# EAGLE board 05_NOT_New (EAGLE 7.5.0)
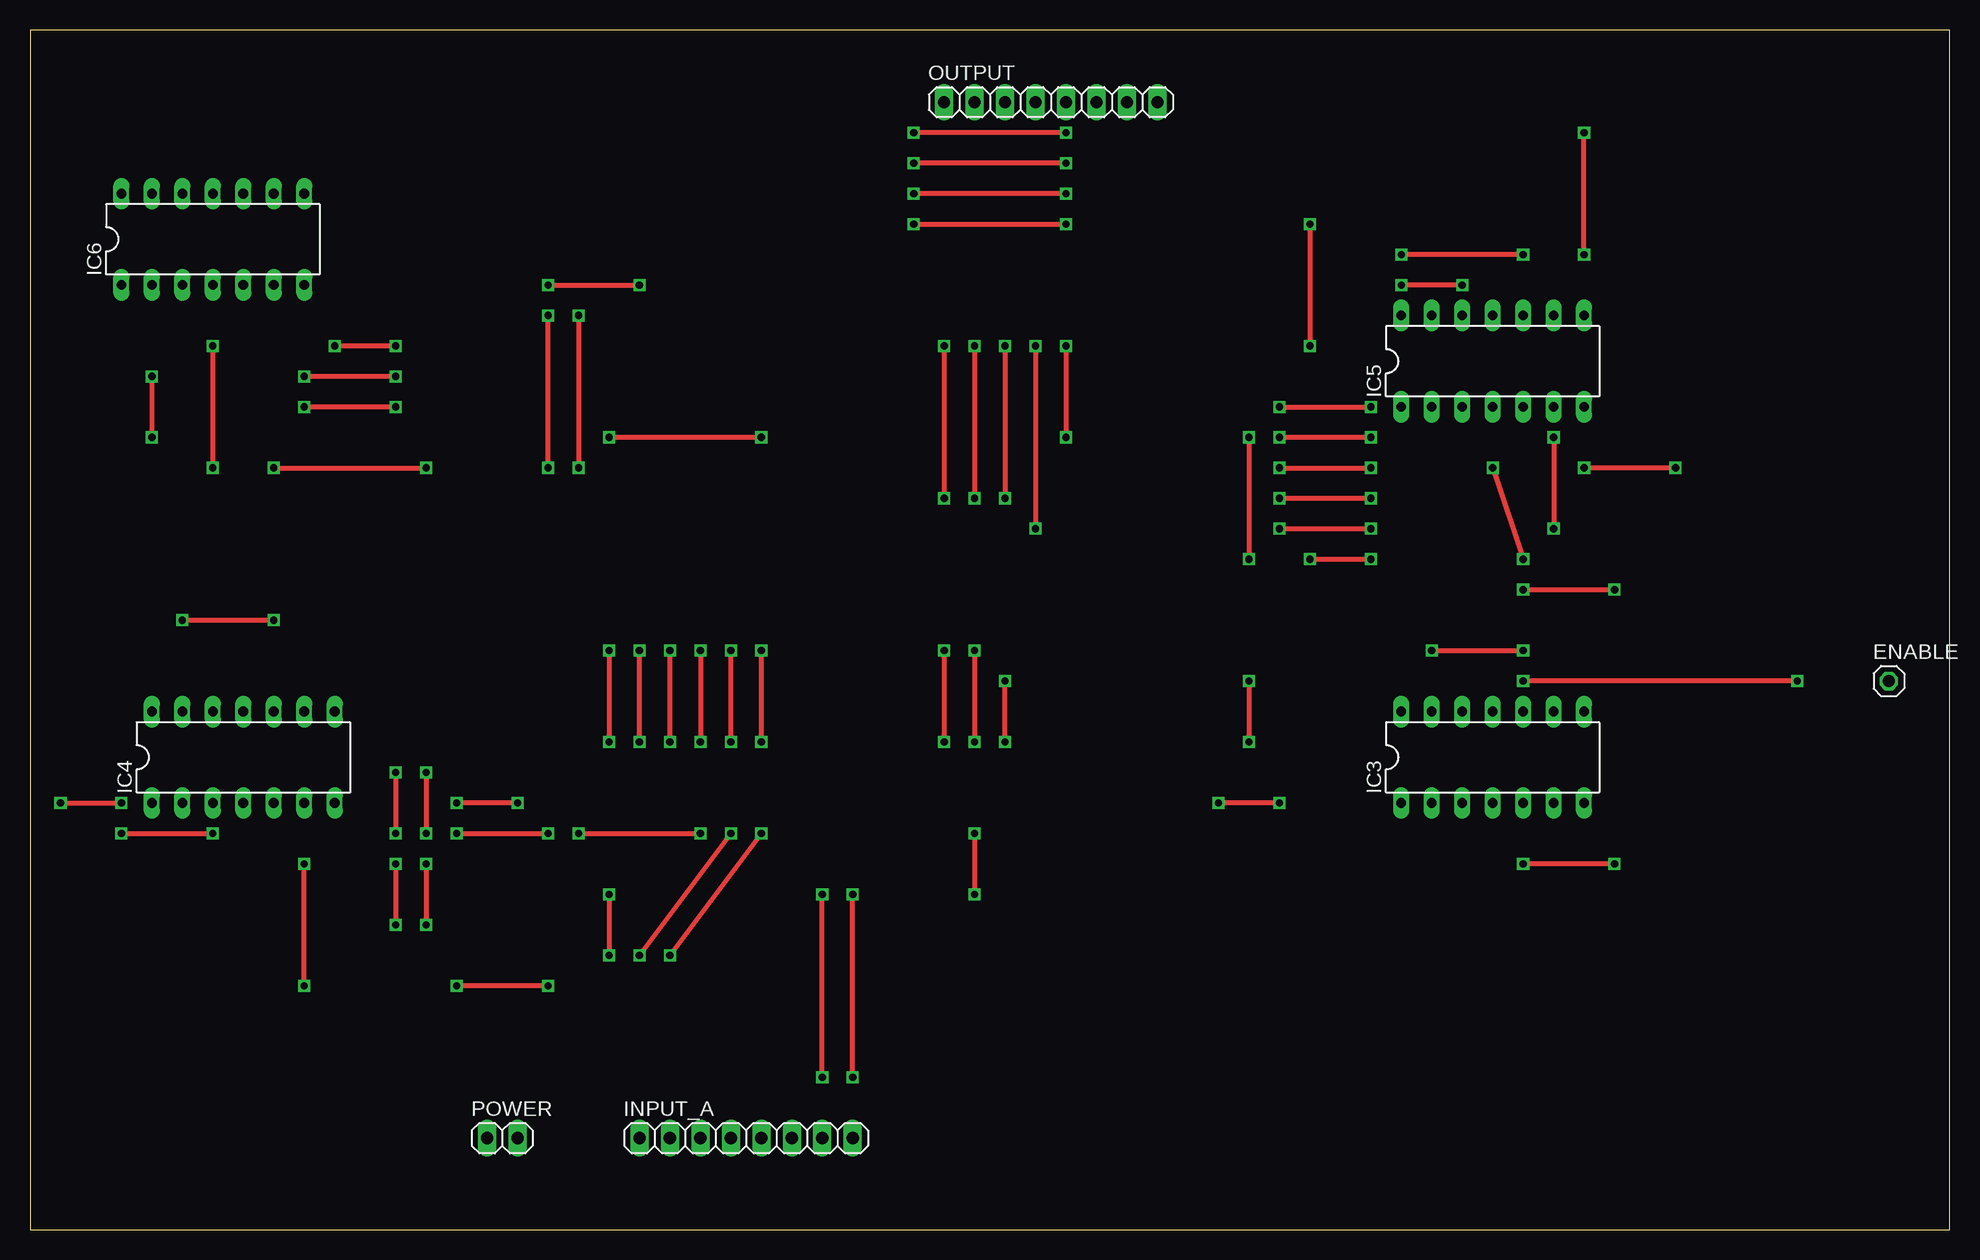
[diagram p0: board, top side]
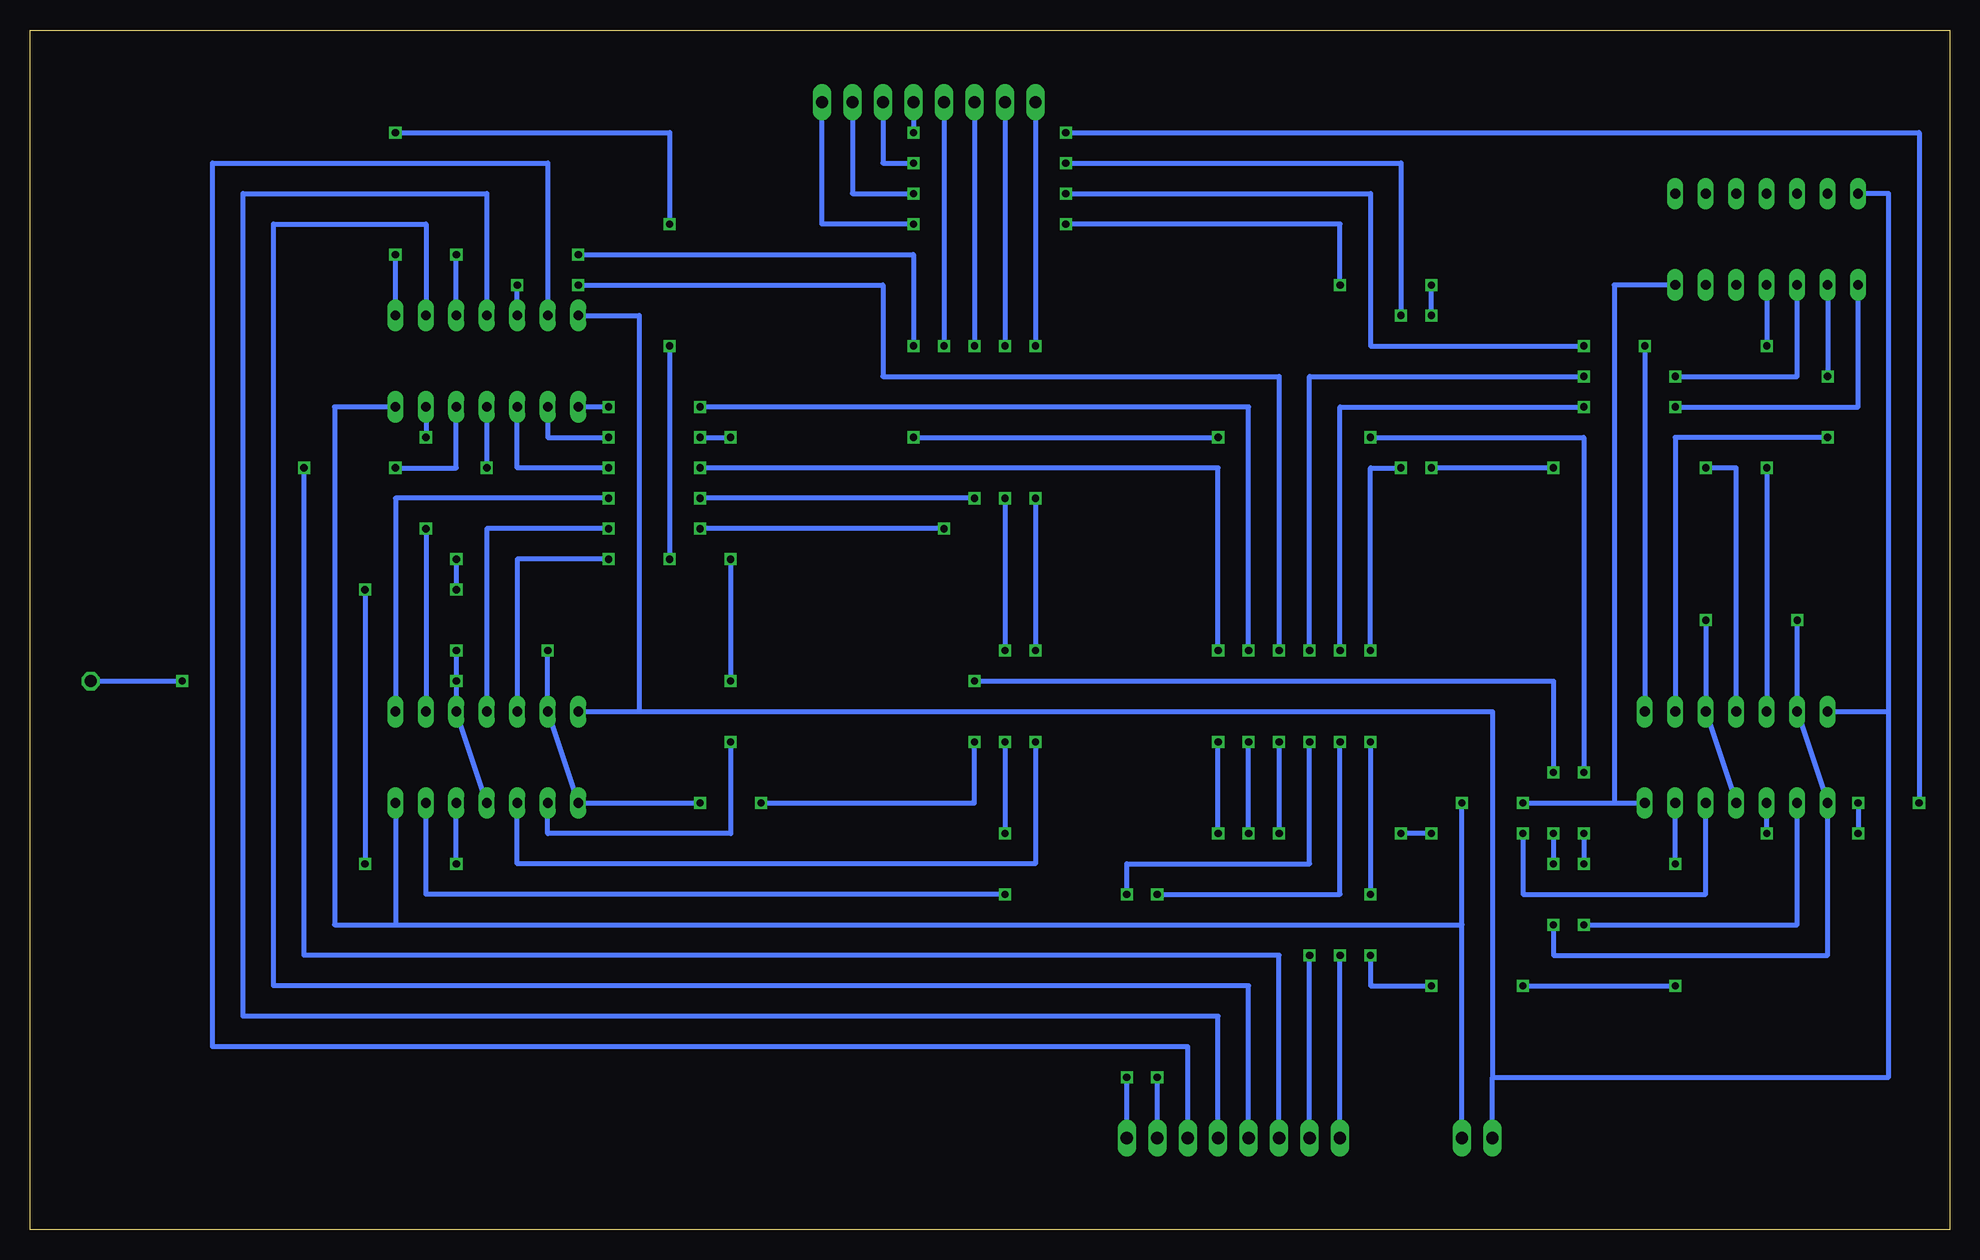
[diagram p1: board, bottom side, seen from below]

Size 160 x 100 mm. Coordinates in mm from the lower left corner, seen from the top.
Outline: 0,0 160,0 160,100 0,100 0,0
Copper layers (1*16): Top 0.035mm / dielectric 1.5mm / Bottom 0.035mm
Design rules "default": minimum track width 10mil, minimum drill 24mil, track to track 8mil, track to pad 8mil, pad to pad 8mil, via to via 8mil, smd to smd 8mil, copper to edge 40mil, drill to drill 8mil, minimum pad ring 10mil, minimum via ring 8mil, stop-mask expansion 4mil, vias tented up to drill 0mil, thermal gap 10mil

## Footprints (pad centres in the part's own frame; a part is rotated, then mirrored left to right if it is on the bottom)
1X01 = drill 1.016 octagon: 1 0,0
DIL14 = drill 0.813 long: 1 -7.62,-3.81; 2 -5.08,-3.81; 3 -2.54,-3.81; 4 0,-3.81; 5 2.54,-3.81; 6 5.08,-3.81; 7 7.62,-3.81; 8 7.62,3.81; 9 5.08,3.81; 10 2.54,3.81; 11 0,3.81; 12 -2.54,3.81; 13 -5.08,3.81; 14 -7.62,3.81
1X08 = drill 1.016 long: 1 -8.89,0; 2 -6.35,0; 3 -3.81,0; 4 -1.27,0; 5 1.27,0; 6 3.81,0; 7 6.35,0; 8 8.89,0
1X02 = drill 1.016 long: 1 -1.27,0; 2 1.27,0

## Placement (x,y rotation side)
ENABLE  [1X01]  154.94,45.72 0 top
IC3  74LS126N  [DIL14]  121.92,39.37 0 top
IC4  74LS126N  [DIL14]  17.78,39.37 0 top
IC5  74LS04N  [DIL14]  121.92,72.39 0 top
IC6  74LS04N  [DIL14]  15.24,82.55 0 top
INPUT_A  [1X08]  59.69,7.62 0 top
OUTPUT  [1X08]  85.09,93.98 0 top
POWER  [1X02]  39.37,7.62 0 top

## Library data of the parts
ENABLE INPUT_A OUTPUT POWER = pinhead
IC3-IC6 = 74xx-eu

## Nets
GND: IC3.7 IC4.7 IC5.7 IC6.7 POWER.2
N$1: IC5.1 INPUT_A.1
N$3: IC5.3 INPUT_A.2
N$5: IC5.5 INPUT_A.3
N$7: IC5.9 INPUT_A.4
N$9: IC5.11 INPUT_A.5
N$11: IC5.13 INPUT_A.6
N$13: IC6.1 INPUT_A.7
N$15: IC6.3 INPUT_A.8
N$18: IC3.5 IC5.4
N$19: IC3.9 IC5.6
N$20: IC3.12 IC5.8
N$21: IC4.2 IC5.10
N$22: IC4.5 IC5.12
N$23: IC4.9 IC6.2
N$24: IC4.12 IC6.4
N$25: IC3.3 OUTPUT.1
N$26: IC3.6 OUTPUT.2
N$27: IC3.8 OUTPUT.3
N$28: IC3.11 OUTPUT.4
N$29: IC4.3 OUTPUT.5
N$30: IC4.6 OUTPUT.6
N$31: IC4.8 OUTPUT.7
N$32: IC4.11 OUTPUT.8
N$33: ENABLE.1 IC3.1 IC3.4 IC3.10 IC3.13 IC4.1 IC4.4 IC4.10 IC4.13
N$34: IC3.2 IC5.2
VCC: IC3.14 IC4.14 IC5.14 IC6.14 POWER.1

## Tracks (layer width: path | path; a pad name or v marks a point on that pad's centre or on a via)
GND  (via drill 0.6)
  Top 0.406: v40.64,35.56 v35.56,35.56
  Bottom 0.406: POWER.2 40.64,25.4 | 40.64,25.4 v40.64,35.56 | v35.56,35.56 27.94,35.56 | 27.94,35.56 IC4.7 | IC6.7 27.94,78.74 27.94,35.56 | IC3.7 129.54,25.4 | 129.54,25.4 40.64,25.4 | IC5.7 134.62,68.58 134.62,25.4 129.54,25.4
N$1  (via drill 0.6)
  Top 0.406: v50.8,22.86 v58.42,33.02 | v58.42,40.64 v58.42,48.26 | v104.14,68.58 v111.76,68.58
  Bottom 0.406: INPUT_A.1 v50.8,22.86 | v58.42,33.02 v58.42,40.64 | v58.42,48.26 58.42,68.58 v104.14,68.58 | v111.76,68.58 IC5.1
N$3  (via drill 0.6)
  Top 0.406: v53.34,22.86 v60.96,33.02 | v60.96,40.64 v60.96,48.26 | v104.14,63.5 v111.76,63.5
  Bottom 0.406: INPUT_A.2 v53.34,22.86 | v60.96,33.02 v60.96,40.64 | v60.96,48.26 60.96,63.5 v104.14,63.5 | v111.76,63.5 119.38,63.5 IC5.3
N$5  (via drill 0.6)
  Top 0.406: v137.16,63.5 v129.54,63.5
  Bottom 0.406: INPUT_A.3 55.88,22.86 137.16,22.86 v137.16,63.5 | v129.54,63.5 124.46,63.5 IC5.5
N$7
  Bottom 0.406: INPUT_A.4 58.42,20.32 139.7,20.32 139.7,83.82 127,83.82 IC5.9
N$9
  Bottom 0.406: INPUT_A.5 60.96,17.78 142.24,17.78 142.24,86.36 121.92,86.36 IC5.11
N$11
  Bottom 0.406: INPUT_A.6 63.5,15.24 144.78,15.24 144.78,88.9 116.84,88.9 IC5.13
N$13  (via drill 0.6)
  Top 0.406: v66.04,12.7 v66.04,27.94 | v50.8,40.64 v50.8,48.26 | v30.48,68.58 v22.86,68.58
  Bottom 0.406: INPUT_A.7 v66.04,12.7 | v66.04,27.94 50.8,27.94 v50.8,40.64 | v50.8,48.26 50.8,68.58 v30.48,68.58 | v22.86,68.58 7.62,68.58 IC6.1
N$15  (via drill 0.6)
  Top 0.406: v68.58,12.7 v68.58,27.94 | v53.34,40.64 v53.34,48.26 | v30.48,71.12 v22.86,71.12
  Bottom 0.406: INPUT_A.8 v68.58,12.7 | v68.58,27.94 68.58,30.48 53.34,30.48 v53.34,40.64 | v53.34,48.26 53.34,71.12 v30.48,71.12 | v22.86,71.12 12.7,71.12 IC6.3
N$18  (via drill 0.6)
  Top 0.406: v121.92,63.5 v124.46,55.88 | v124.46,53.34 v132.08,53.34 | v132.08,30.48 v124.46,30.48
  Bottom 0.406: IC5.4 v121.92,63.5 | v124.46,55.88 v124.46,53.34 | v132.08,53.34 v132.08,30.48 | v124.46,30.48 IC3.5
N$19  (via drill 0.6)
  Top 0.406: v127,66.04 v127,58.42
  Bottom 0.406: IC5.6 v127,66.04 | v127,58.42 IC3.9
N$20  (via drill 0.6)
  Top 0.406: v129.54,81.28 v129.54,91.44 | v106.68,83.82 v106.68,73.66 | v106.68,55.88 v111.76,55.88
  Bottom 0.406: IC5.8 v129.54,81.28 | v129.54,91.44 106.68,91.44 v106.68,83.82 | v106.68,73.66 v106.68,55.88 | v111.76,55.88 119.38,55.88 IC3.12
N$21  (via drill 0.6)
  Top 0.406: v124.46,81.28 v114.3,81.28 | v86.36,73.66 v86.36,66.04 | v60.96,66.04 v48.26,66.04 | v30.48,38.1 v30.48,33.02 | v30.48,30.48 v30.48,25.4
  Bottom 0.406: IC5.10 v124.46,81.28 | v114.3,81.28 86.36,81.28 v86.36,73.66 | v86.36,66.04 v60.96,66.04 | v48.26,66.04 30.48,66.04 v30.48,38.1 | v30.48,33.02 v30.48,30.48 | v30.48,25.4 12.7,25.4 IC4.2
N$22  (via drill 0.6)
  Top 0.406: v119.38,78.74 v114.3,78.74 | v55.88,48.26 v55.88,40.64 | v35.56,33.02 v43.18,33.02 | v45.72,33.02 v55.88,33.02
  Bottom 0.406: IC5.12 v119.38,78.74 | v114.3,78.74 88.9,78.74 88.9,71.12 55.88,71.12 v55.88,48.26 | v55.88,40.64 v55.88,33.02 | v35.56,33.02 35.56,27.94 20.32,27.94 IC4.5 | v43.18,33.02 v45.72,33.02
N$23  (via drill 0.6)
  Top 0.406: v10.16,71.12 v10.16,66.04
  Bottom 0.406: IC6.2 v10.16,71.12 | v10.16,66.04 22.86,66.04 IC4.9
N$24  (via drill 0.6)
  Top 0.406: v15.24,73.66 v15.24,63.5
  Bottom 0.406: IC6.4 v15.24,73.66 | v15.24,63.5 IC4.12
N$25  (via drill 0.6)
  Top 0.406: v76.2,73.66 v76.2,60.96 | v76.2,48.26 v76.2,40.64
  Bottom 0.406: OUTPUT.1 v76.2,73.66 | v76.2,60.96 v76.2,48.26 | v76.2,40.64 76.2,30.48 119.38,30.48 IC3.3
N$26  (via drill 0.6)
  Top 0.406: v78.74,73.66 v78.74,60.96 | v78.74,48.26 v78.74,40.64 | v78.74,33.02 v78.74,27.94
  Bottom 0.406: OUTPUT.2 v78.74,73.66 | v78.74,60.96 v78.74,48.26 | v78.74,40.64 v78.74,33.02 | v78.74,27.94 127,27.94 IC3.6
N$27  (via drill 0.6)
  Top 0.406: v81.28,73.66 v81.28,60.96 | v104.14,60.96 v111.76,60.96
  Bottom 0.406: OUTPUT.3 v81.28,73.66 | v81.28,60.96 v104.14,60.96 | v111.76,60.96 129.54,60.96 IC3.8
N$28  (via drill 0.6)
  Top 0.406: v83.82,73.66 v83.82,58.42 | v104.14,58.42 v111.76,58.42
  Bottom 0.406: OUTPUT.4 v83.82,73.66 | v83.82,58.42 v104.14,58.42 | v111.76,58.42 121.92,58.42 IC3.11
N$29  (via drill 0.6)
  Top 0.406: v86.36,91.44 v73.66,91.44 | v2.54,35.56 v7.62,35.56 | v7.62,33.02 v15.24,33.02
  Bottom 0.406: OUTPUT.5 v86.36,91.44 | v73.66,91.44 2.54,91.44 v2.54,35.56 | v7.62,35.56 v7.62,33.02 | v15.24,33.02 IC4.3
N$30  (via drill 0.6)
  Top 0.406: v86.36,88.9 v73.66,88.9 | v45.72,76.2 v45.72,63.5 | v48.26,48.26 v48.26,40.64 | v48.26,27.94 v48.26,22.86 | v43.18,20.32 v35.56,20.32 | v22.86,20.32 v22.86,30.48
  Bottom 0.406: OUTPUT.6 88.9,88.9 v86.36,88.9 | v73.66,88.9 45.72,88.9 v45.72,76.2 | v48.26,40.64 v48.26,27.94 | v48.26,22.86 48.26,20.32 v43.18,20.32 | v35.56,20.32 v22.86,20.32 | v22.86,30.48 IC4.6 | v48.26,48.26 48.26,63.5 v45.72,63.5
N$31  (via drill 0.6)
  Top 0.406: v86.36,86.36 v73.66,86.36 | v30.48,73.66 v25.4,73.66
  Bottom 0.406: OUTPUT.7 91.44,86.36 v86.36,86.36 | v73.66,86.36 48.26,86.36 48.26,73.66 v30.48,73.66 | v25.4,73.66 IC4.8
N$32  (via drill 0.6)
  Top 0.406: v20.32,63.5 v33.02,63.5 | v43.18,63.5 v43.18,76.2 | v43.18,78.74 v50.8,78.74 | v73.66,83.82 v86.36,83.82
  Bottom 0.406: IC4.11 17.78,63.5 v20.32,63.5 | v33.02,63.5 v43.18,63.5 | v43.18,76.2 v43.18,78.74 | v50.8,78.74 50.8,83.82 v73.66,83.82 | v86.36,83.82 93.98,83.82 OUTPUT.8
N$33  (via drill 0.6)
  Top 0.406: v147.32,45.72 v124.46,45.72 | v104.14,35.56 v99.06,35.56 | v81.28,40.64 v81.28,45.72 | v33.02,38.1 v33.02,33.02 | v33.02,30.48 v33.02,25.4 | v12.7,50.8 v20.32,50.8 | v116.84,48.26 v124.46,48.26
  Bottom 0.406: IC4.4 IC4.10 v20.32,50.8 | IC3.4 IC3.10 v124.46,45.72 v124.46,48.26 | ENABLE.1 v147.32,45.72 | v104.14,35.56 IC3.1 IC3.13 v116.84,48.26 | v99.06,35.56 81.28,35.56 v81.28,40.64 | v81.28,45.72 33.02,45.72 v33.02,38.1 | v33.02,33.02 v33.02,30.48 | v33.02,25.4 33.02,22.86 10.16,22.86 IC4.1 IC4.13 v12.7,50.8
  other vias: 10.16,35.56
N$34  (via drill 0.6)
  Top 0.406: v111.76,66.04 v104.14,66.04 | v101.6,66.04 v101.6,55.88 | v101.6,45.72 v101.6,40.64
  Bottom 0.406: IC5.2 116.84,66.04 v111.76,66.04 | v104.14,66.04 v101.6,66.04 | v101.6,55.88 v101.6,45.72 | v101.6,40.64 101.6,33.02 116.84,33.02 IC3.2
VCC
  Bottom 0.406: POWER.1 38.1,12.7 | 38.1,12.7 5.08,12.7 5.08,43.18 | 5.08,43.18 5.08,86.36 IC6.14 | IC4.14 5.08,43.18 | IC3.14 109.22,43.18 | 109.22,43.18 38.1,43.18 38.1,12.7 | IC5.14 109.22,76.2 109.22,43.18